# Altium PCB ADC-RDC.PcbDoc (part 1 of 2)
Units mm, origin at the board's own origin, x right, y up, seen from the top; angles counter-clockwise.
Board outline 88 x 48 mm, 4 copper layers (Top Layer, Int1, Int2, Bottom Layer), stack 1.48 mm thick; 188 components, 156 nets, 726 pads, 250 vias.
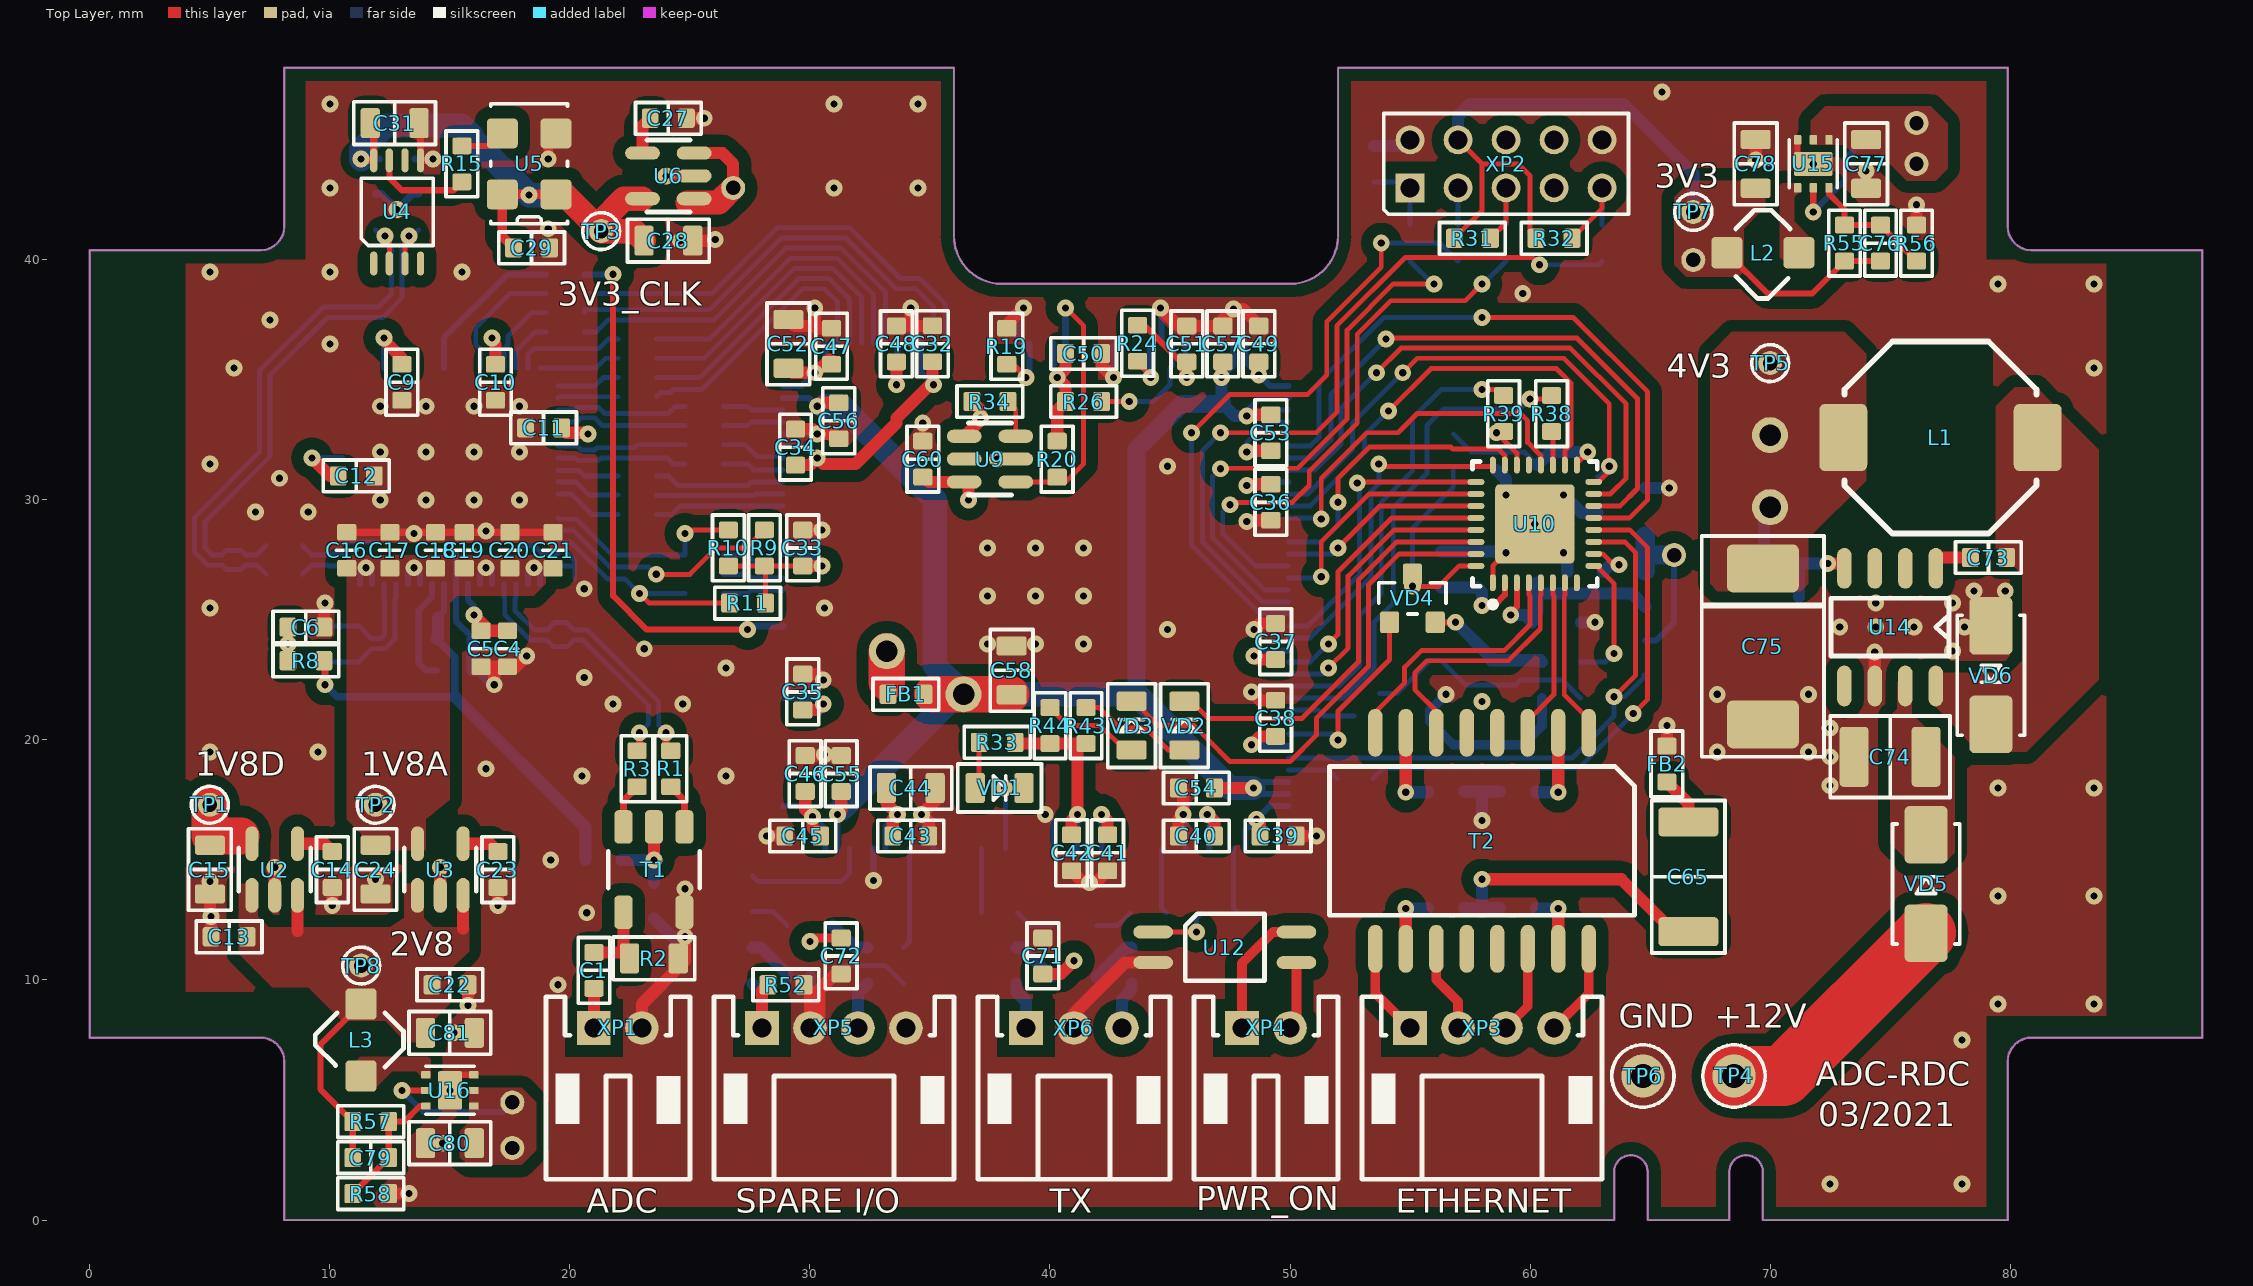
[diagram p0: Top Layer view]
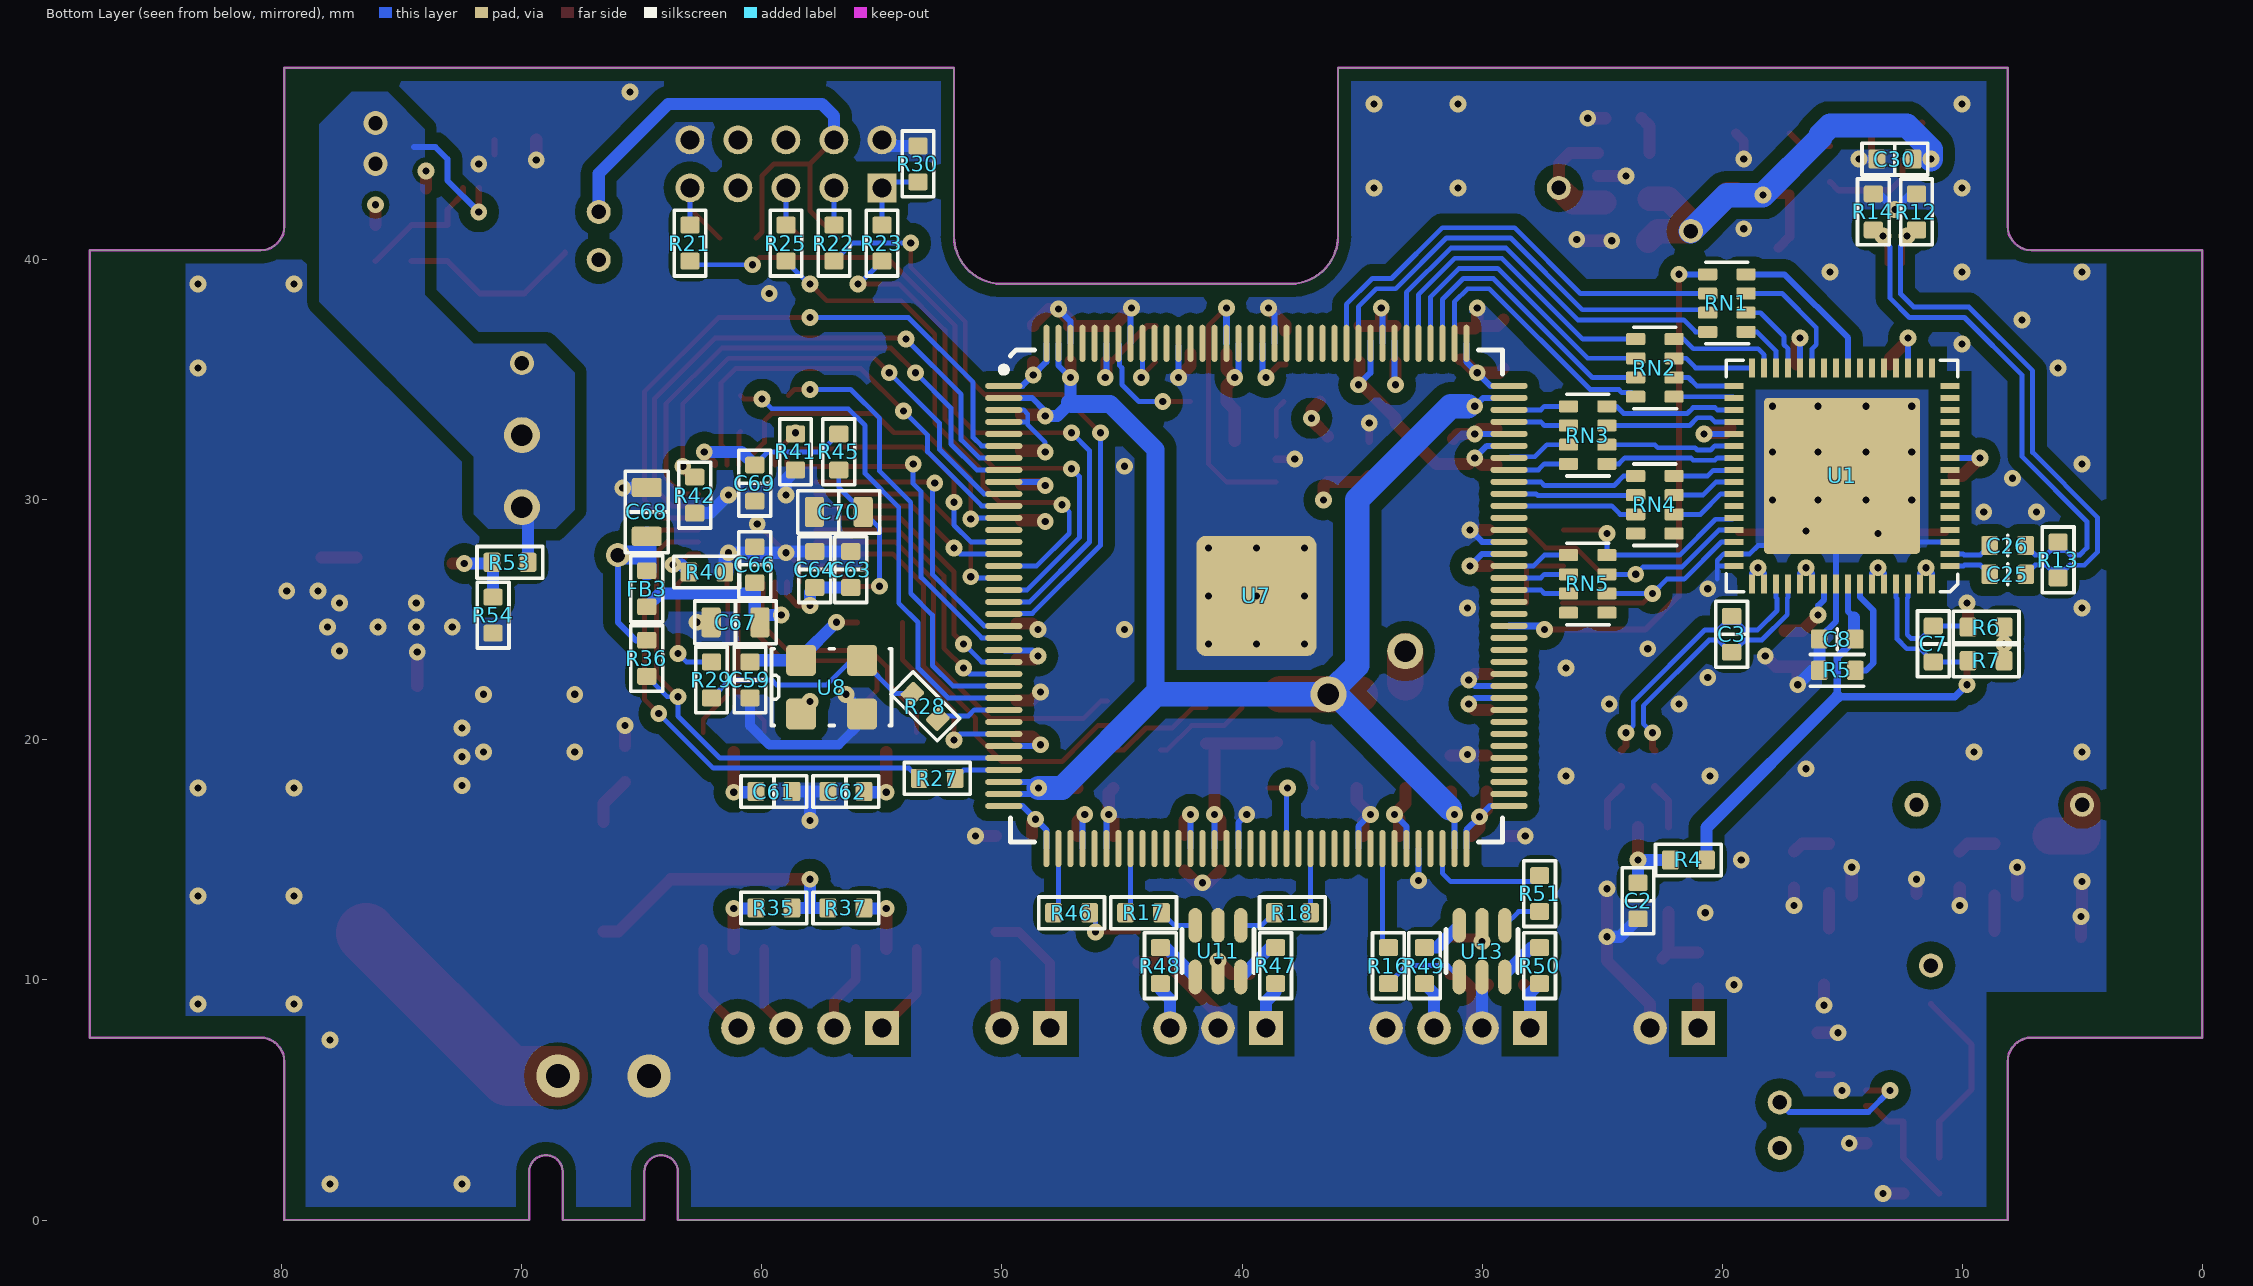
[diagram p1: Bottom Layer view, seen from below]
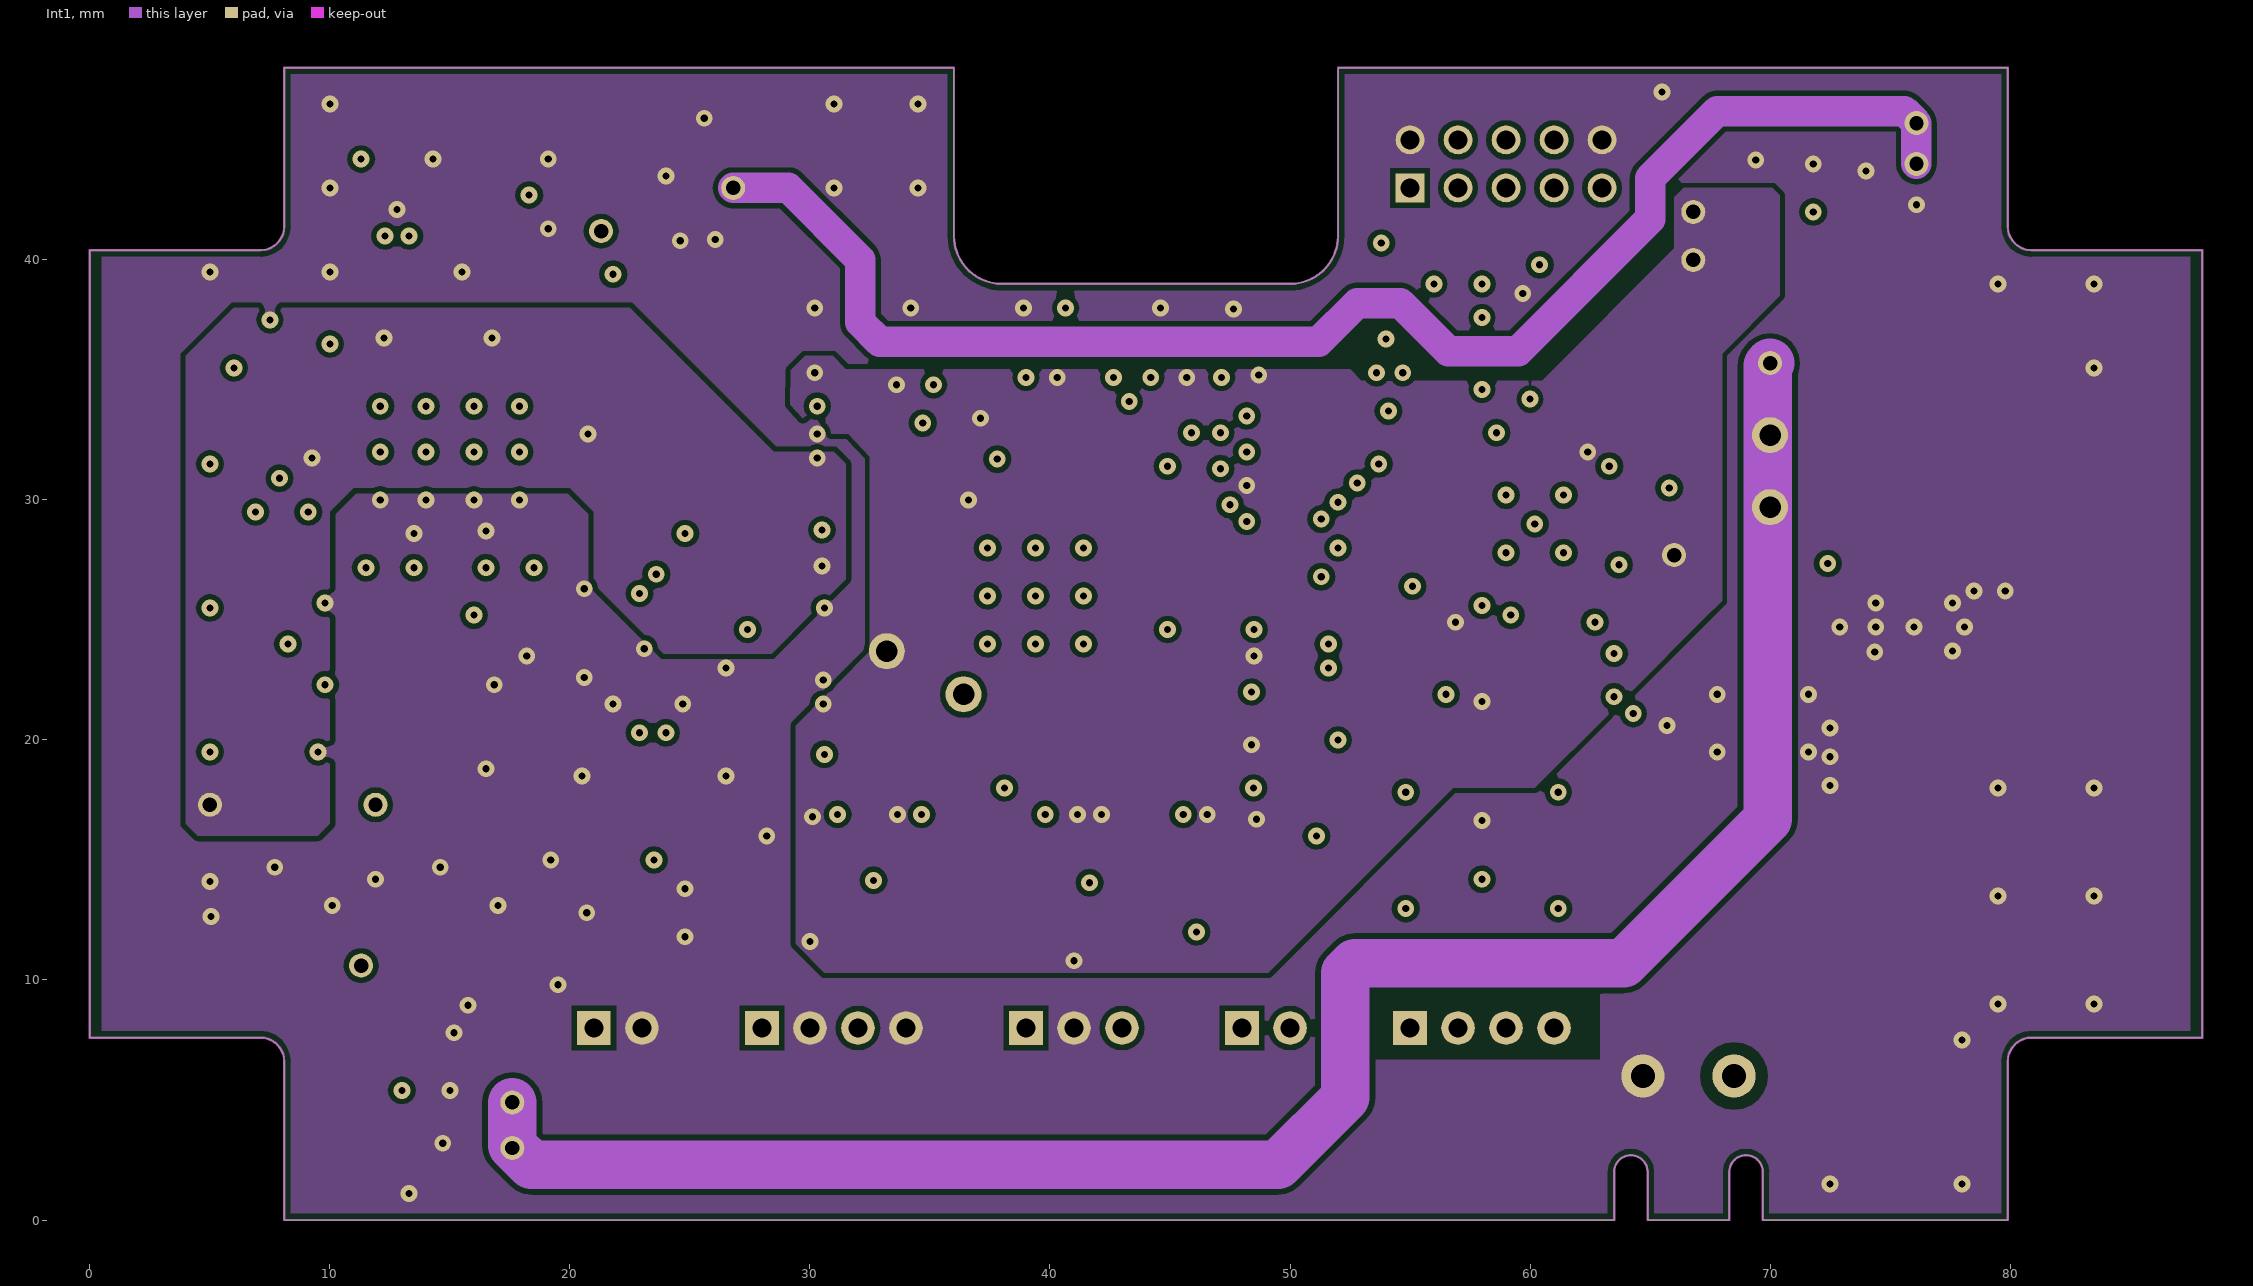
[diagram p2: Int1]
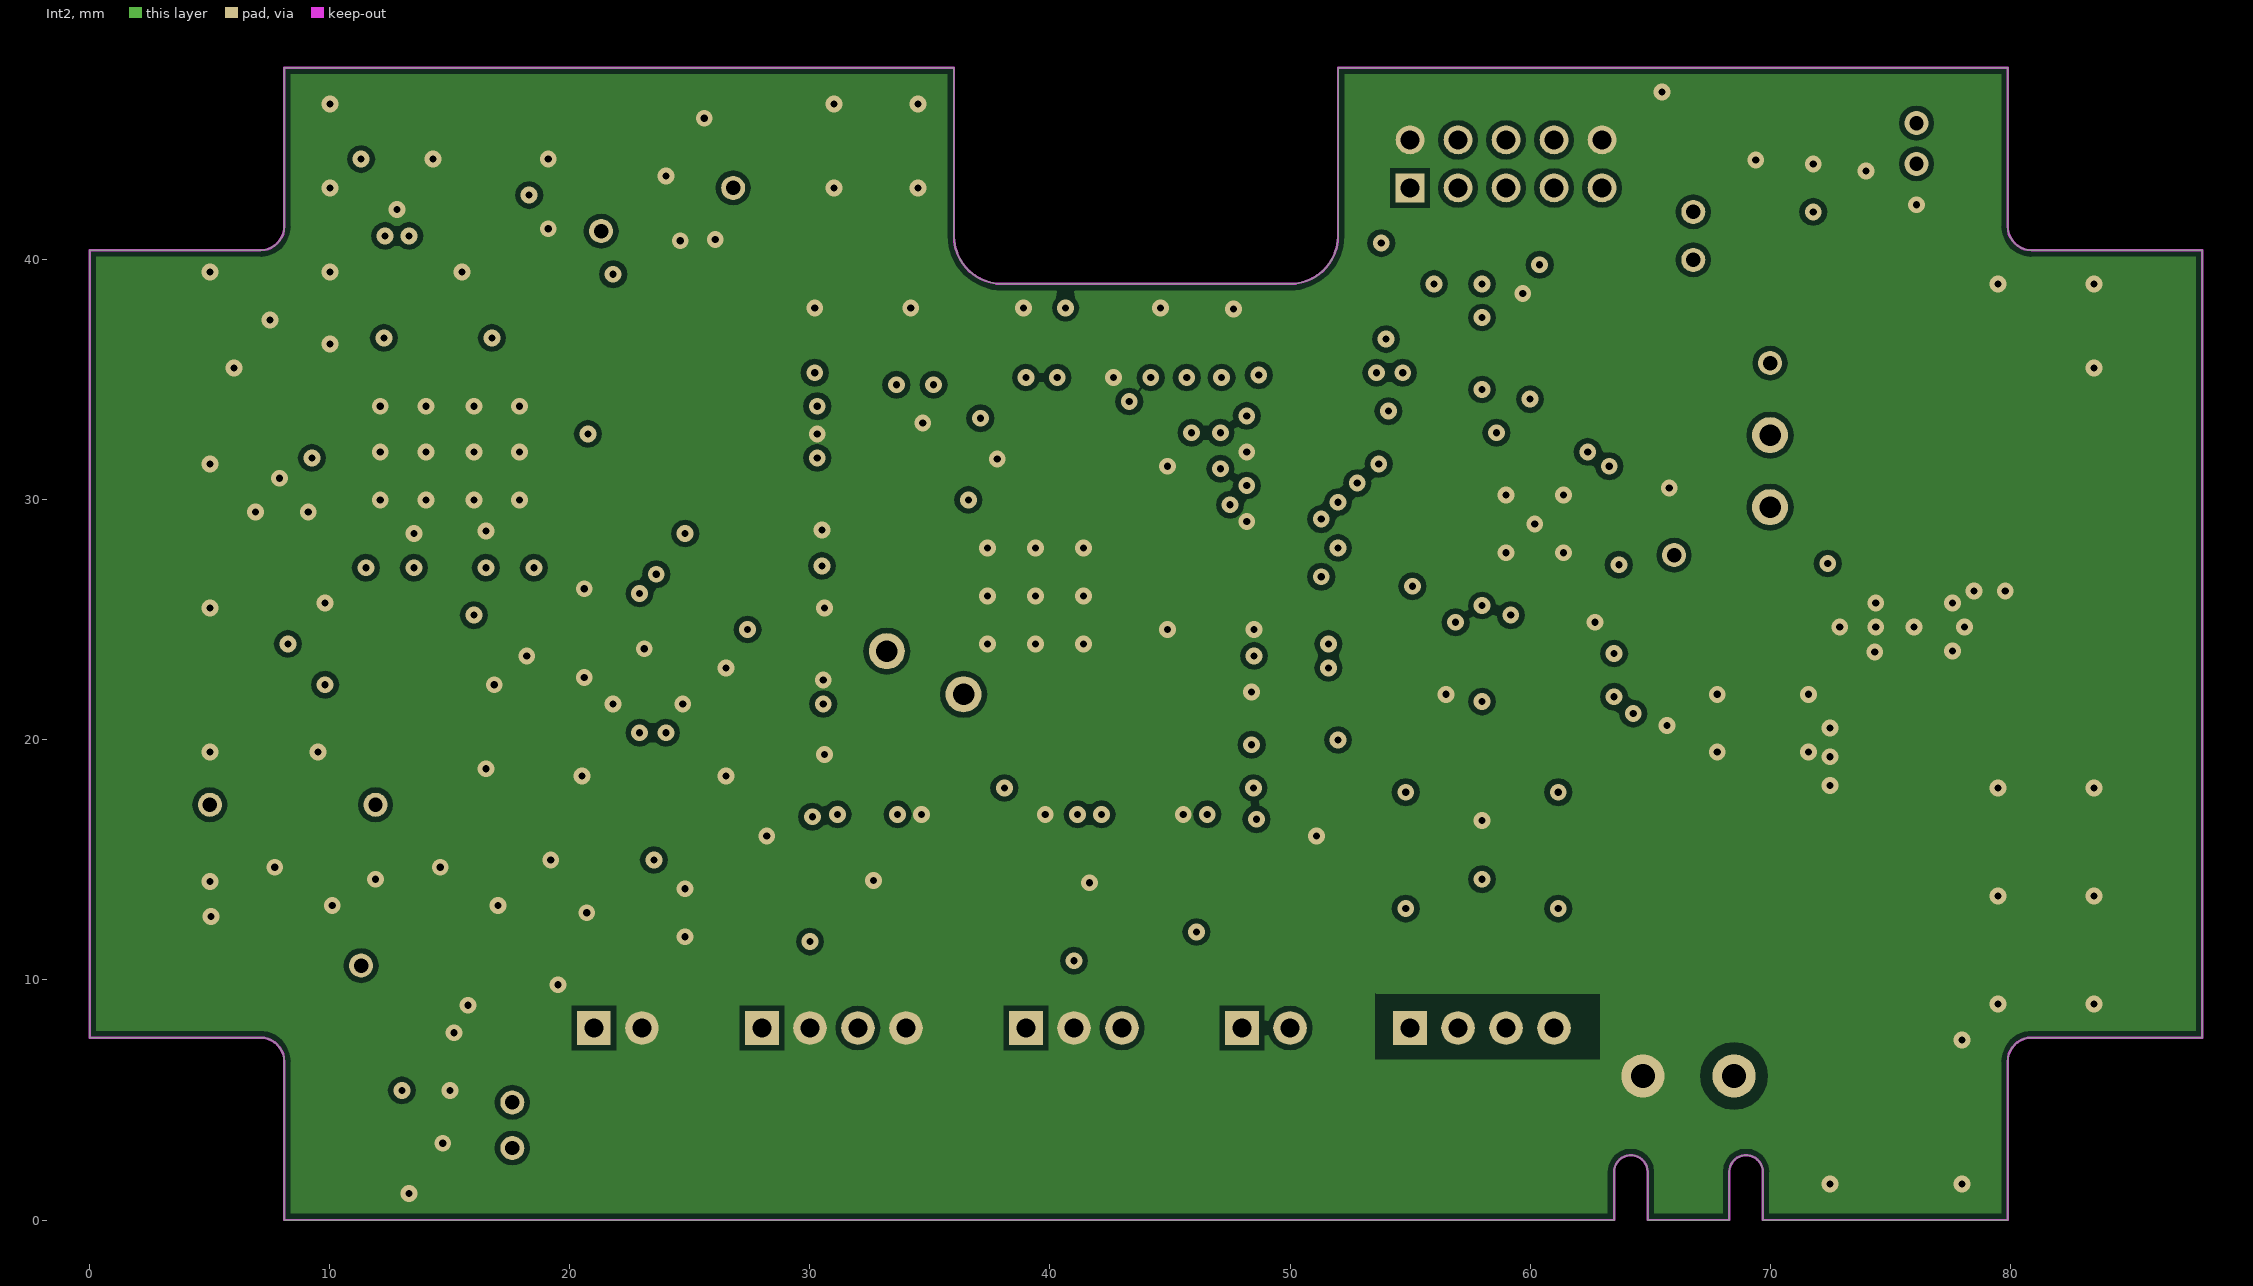
[diagram p3: Int2]

## Layer stack, top to bottom
Top Solder: solder mask 0.0102, Solder Resist, Dk 3.5
Top Layer: signal copper 0.018
Dielectric 1: core 0.254, FR-4, Dk 4.2
Int1: signal copper 0.018
Dielectric 3: prepreg 0.9, Dk 4.2
Int2: signal copper 0.018
Dielectric 2: core 0.254, Dk 4.2
Bottom Layer: signal copper 0.018
Bottom Solder: solder mask 0.0102, Solder Resist, Dk 3.5

## Board outline
0,7.6 7.1,7.6 cw(c7.1,6.6) 8.1,6.6 8.1,0 63.5,0 63.5,2 cw(c64.2,2) 64.9,2 64.9,0 68.3,0 68.3,2 cw(c69,2) 69.7,2 69.7,0 79.9,0 79.9,6.6 cw(c80.9,6.6) 80.9,7.6 88,7.6 88,40.4 80.9,40.4 cw(c80.9,41.4) 79.9,41.4 79.9,48 52,48 52,41 cw(c50,41) 50,39 38,39 cw(c38,41) 36,41 36,48 8.1,48 8.1,41.4 cw(c7.1,41.4) 7.1,40.4 0,40.4

## Design rules (kind name [scope] priority, off if disabled: settings)
Clearance Clearance_Power_pin [IsPad  And (HoleSize  >= 1.0)] p1: gap=0.5 ignorepadtopadclearanceinfootprint=FALSE
Clearance Clearance_out_gnd_poly [(InNet ('GND')  And InPolygon) And (OnLayer('Top Layer') Or OnLayer('Bottom Layer'))] p2: gap=0.5 ignorepadtopadclearanceinfootprint=FALSE
Clearance Clearance_int_poly [InPolygon And (OnLayer('Signal Layer 1') Or OnLayer('Signal Layer 2'))] p3: gap=0.22 ignorepadtopadclearanceinfootprint=FALSE
Clearance [All] p4: gap=0.22 ignorepadtopadclearanceinfootprint=FALSE
ComponentClearance [All] p1: gap=0 collisioncheckmode=3 verticalgap=0.254 showdistances=FALSE
Height [All] p1: minheight=0 maxheight=6 prefheight=6
HoleSize [All] p1: absolutevalues=TRUE maxlimit=5 minlimit=0.3 maxpercent=80.000 minpercent=20.000
MinimumSolderMaskSliver [All] p1: minsoldermaskwidth=0
PolygonConnect PolygonConnect_1 [All] p1: connectstyle=Direct reliefconductorwidth=0.254 reliefentries=4 polygonreliefangle="45 Angle" airgapwidth=0.254
PolygonConnect [InNet('GND')] p2: thpad.connectstyle=Relief thpad.reliefconductorwidth=0.508 thpad.reliefentries=4 thpad.polygonreliefangle="90 Angle" thpad.airgapwidth=0.508 smdpad.connectstyle=Direct smdpad.reliefconductorwidth=0.254 smdpad.reliefentries=4 smdpad.polygonreliefangle="45 Angle" smdpad.airgapwidth=0.254 via.connectstyle=Direct via.reliefconductorwidth=0.254 via.reliefentries=4 via.polygonreliefangle="45 Angle" via.airgapwidth=0.254
RoutingVias [All] p1: holewidth=0.3 width=0.7 viastyle="Through Hole" minholewidth=0.3 minwidth=0.7 maxholewidth=0.3 maxwidth=0.7
SilkToSilkClearance [All] p1: silktosilkclearance=0
SilkToSolderMaskClearance [IsPad] p1: minsilkscreentomaskgap=0 clearancetoexposedcopper=TRUE
SolderMaskExpansion [All] p1: expansion=0.102
Width [All] p1: maxlimit=5 minlimit=0.203 preferedwidth=0.254
24 further rules are at their usual default settings.

## Classes and differential pairs
net class TX_D[3..0]: TX_D0 TX_D1 TX_D2 TX_D3
net class RX_D[3..0]: RX_D0 RX_D1 RX_D2 RX_D3
net class FADCA[13..0]: FADCA0 FADCA1 FADCA2 FADCA3 FADCA4 FADCA5 FADCA6 FADCA7 FADCA8 FADCA9 FADCA10 FADCA11 FADCA12 FADCA13
component class U_ADC-RDC-Power: C73 C74 C75 C76 C77 C78 C79 C80 C81 L1 L2 L3 R53 R54 R55 R56 R57 R58 TP4 TP5 TP6 TP7 TP8 U14 U15 U16 VD5 VD6
component class U_ADC-RDC-PHY: C61 C62 C63 C64 C65 C66 C67 C68 C69 C70 FB2 FB3 R35 R36 R37 R38 R39 R40 R41 R42 R43 R44 R45 T2 U10 VD2 VD3 VD4 XP3
component class U_ADC-RDC-IO: C71 C72 R46 R47 R48 R49 R50 R51 R52 U11 U12 U13 XP4 XP5 XP6
component class U_ADC-RDC-FPGA: C32 C33 C34 C35 C36 C37 C38 C39 C40 C41 C42 C43 C44 C45 C46 C47 C48 C49 C50 C51 C52 C53 C54 C55 C56 C57 C58 C59 C60 FB1 R16 R17 R18 R19 R20 R21 R22 R23 R24 R25 R26 R27 R28 R29 R30 R31 R32 R33 R34 RN5 U7 U8 U9 VD1 XP2
component class U_ADC-RDC-ADC: C1 C2 C3 C4 C5 C6 C7 C8 C9 C10 C11 C12 C13 C14 C15 C16 C17 C18 C19 C20 C21 C22 C23 C24 C25 C26 C27 C28 C29 C30 C31 R1 R2 R3 R4 R5 R6 R7 R8 R9 R10 R11 R12 R13 R14 R15 RN1 RN2 RN3 RN4 T1 TP1 TP2 TP3 U1 U2 U3 U4 U5 U6 XP1

## Components (designator, comment, footprint, x,y, rotation, side; value= is the part's Value field where it differs from the comment)
C1 "0.1uF" C0603 21,10.4 r270 top
C2 "0.1uF" C0603 23.5,13.3 r270 bottom
C3 "10 pF" C0603 19.6,24.4 r270 bottom
C4 "1.0uF" C0603L 17.4,23.8 r90 top
C5 "0.1uF" C0603L 16.3,23.8 r90 top
C6 "0.1uF" C0603 9,24.7 r0 top
C7 "10 pF" C0603 11.2,24 r270 bottom
C8 "0.1uF" C0603L 15.2,24.2 r180 bottom
C9 "0.1uF" C0603 13,34.9 r90 top
C10 "0.1uF" C0603 16.9,34.9 r90 top
C11 "0.1uF" C0603 18.9,33 r0 top
C12 "0.1uF" C0603 11.1,31 r180 top
C13 "0.1uF" C0603 5.8,11.8 r0 top
C14 "0.01uF" C0603 10.1,14.6 r90 top
C15 "22uFx6.3V" C0805 5,14.6 r90 top
C16 "0.1uF" C0603L 10.7,27.9 r270 top
C17 "0.1uF" C0603L 12.5,27.9 r270 top
C18 "0.1uF" C0603L 14.4,27.9 r270 top
C19 "0.1uF" C0603L 15.6,27.9 r270 top
C20 "0.1uF" C0603L 17.5,27.9 r270 top
C21 "0.1uF" C0603L 19.3,27.9 r270 top
C22 "0.1uF" C0603 15,9.8 r180 top
C23 "0.01uF" C0603 17,14.6 r90 top
C24 "22uFx6.3V" C0805 11.9,14.6 r90 top
C25 "0.1uF" C0603L 8.1,26.9 r0 bottom
C26 "0.1uF" C0603L 8.1,28.1 r0 bottom
C27 "0.01uF" C0603 24.1,45.9 r180 top
C28 "22uFx6.3V" C0805 24.1,40.8 r180 top
C29 "0.1uF" C0603 18.4,40.5 r180 top
C30 "0.1uF" C0603 12.8,44.2 r180 bottom
C31 "10uFx10V" C0805 12.7,45.7 r180 top
C32 "0.1uF" C0603 35.1,36.51 r270 top
C33 "0.1uF" C0603 29.7,28 r270 top
C34 "0.1uF" C0603 29.4,32.2 r270 top
C35 "0.1uF" C0603 29.7,22 r270 top
C36 "0.1uF" C0603 49.2,29.9 r90 top
C37 "0.1uF" C0603 49.4,24.1 r270 top
C38 "0.1uF" C0603 49.4,20.9 r270 top
C39 "0.1uF" C0603 49.5,16 r180 top
C40 "0.1uF" C0603 46.1,16 r0 top
C41 "0.1uF" C0603 42.4,15.3 r90 top
C42 "0.1uF" C0603 40.9,15.3 r90 top
C43 "0.1uF" C0603 34.2,16 r180 top
C44 "10uFx10V" C0805 34.2,18 r0 top
C45 "0.1uF" C0603 29.7,16 r0 top
C46 "0.1uF" C0603 29.8,18.6 r270 top
C47 "0.1uF" C0603 30.9,36.4 r270 top
C48 "0.1uF" C0603 33.6,36.5 r270 top
C49 "0.1uF" C0603 48.7,36.5 r270 top
C50 "0.1uF" C0603 41.4,36.1 r180 top
C51 "0.1uF" C0603 45.7,36.5 r270 top
C52 "10uFx10V" C0805 29.1,36.5 r90 top
C53 "0.1uF" C0603 49.2,32.8 r90 top
C54 "0.1uF" C0603 46.1,18 r0 top
C55 "0.1uF" C0603 31.3,18.6 r270 top
C56 "0.1uF" C0603 31.2,33.3 r90 top
C57 "0.1uF" C0603 47.2,36.5 r270 top
C58 "10uFx10V" C0805 38.4,22.9 r90 top
C59 "0.1uF" C0603 60.5,22.5 r90 bottom
C60 "0.1uF" C0603 34.7,31.7 r270 top
C61 "0.1uF" C0603 59.5,17.85 r180 bottom
C62 "0.1uF" C0603 56.5,17.85 r0 bottom
C63 "2.2uFx6.3V" C0603 56.3,27.1 r90 bottom
C64 "0.1uF" C0603 57.8,27.1 r270 bottom
C65 "1nFx3000V" C1808 66.6,14.3 r90 top locked
C66 "0.1uF" C0603 60.3,27.3 r270 bottom
C67 "22uFx6.3V" C0805 61.1,24.9 r180 bottom
C68 "22uFx6.3V" C0805 64.8,29.5 r270 bottom
C69 "0.1uF" C0603 60.3,30.7 r90 bottom
C70 "10uFx10V" C0805 56.8,29.5 r0 bottom
C71 "0.1uF" C0603 39.7,11 r270 top
C72 "0.1uF" C0603 31.3,11 r90 top
C73 "0.01uF" C0603 79.1,27.6 r0 top
C74 "10uFx25V" C1210 75,19.3 r180 top
C75 "100uFx16V" "SIZE E" 69.7,23.9 r270 top
C76 "22pF" C0603 74.6,40.7 r90 top
C77 "10uFx10V" C0805 74,44 r270 top
C78 "10uFx10V" C0805 69.4,44 r90 top
C79 "22pF" C0603 11.7,2.6 r0 top
C80 "10uFx10V" C0805 15,3.2 r180 top
C81 "10uFx10V" C0805 15,7.8 r0 top
FB1 "BLM18AG102SN1" R0603 34,21.9 r180 top
FB2 "BLM18AG121SN1" R0603 65.7,19 r90 top
FB3 "BLM18AG102SN1" R0603 64.8,26.3 r270 bottom
L1 "CDRH8D43NP-330NC" CDRH8D43 77.1,32.6 r180 top
L2 "CDRH2D14NP-2R2N" CDRH2D18 69.7,40.3 r45 top
L3 "CDRH2D14NP-2R2N" CDRH2D18 11.3,7.5 r315 top
R1 "15" R0603 24.2,18.8 r90 top
R2 "51" R0805 23.5,10.9 r0 top
R3 "15" R0603 22.8,18.8 r90 top
R4 "200" R0603 21.4,15 r180 bottom
R5 "10K" R0603L 15.2,22.9 r180 bottom
R6 "15" R0603 9,24.7 r0 bottom
R7 "15" R0603 9,23.3 r0 bottom
R8 "200" R0603 9,23.3 r0 top
R9 "1K" R0603 28.1,28 r90 top
R10 "1K" R0603 26.6,28 r90 top
R11 "1K" R0603 27.4,25.7 r180 top
R12 "240" R0603 11.9,42 r270 bottom
R13 "100" R0603 6,27.5 r90 bottom
R14 "240" R0603 13.7,42 r270 bottom
R15 "10" R0603 15.5,44 r270 top
R16 "33" R0603 33.9,10.6 r90 bottom
R17 "33" R0603 44.1,12.8 r0 bottom
R18 "33" R0603 37.9,12.8 r180 bottom
R19 "10K" R0603 38.2,36.4 r270 top
R20 "10K" R0603 40.3,31.7 r270 top
R21 "33" R0603 63,40.7 r90 bottom
R22 "33" R0603 57,40.7 r90 bottom
R23 "33" R0603 55,40.7 r90 bottom
R24 "10K" R0603 43.65,36.525 r270 top
R25 "33" R0603 59,40.7 r90 bottom
R26 "10K" R0603 41.4,34.1 r0 top
R27 "33" R0603 52.7,18.4 r0 bottom
R28 "33" R0603 53.2,21.4 r225 bottom
R29 "33" R0603 62.1,22.5 r90 bottom
R30 "1K" R0603 53.5,44 r270 bottom
R31 "10K" R0603 57.6,40.9 r0 top
R32 "10K" R0603 61,40.9 r0 top
R33 "1K" R0603 37.8,19.9 r180 top
R34 "3K3" R0603 37.5,34.1 r180 top
R35 "75" R0603 59.5,13 r180 bottom
R36 "3K3" R0603 64.8,23.4 r270 bottom
R37 "75" R0603 56.5,13 r0 bottom
R38 "33" R0603 60.9,33.6 r270 top
R39 "33" R0603 58.9,33.6 r270 top
R40 "6K49" R0603 62.3,27 r180 bottom
R41 "1K" R0603 58.6,32 r270 bottom
R42 "1K" R0603 62.8,30.2 r270 bottom
R43 "330" R0603 41.5,20.6 r270 top
R44 "330" R0603 40,20.6 r270 top
R45 "10K" R0603 56.8,32 r90 bottom
R46 "430" R0603 47.1,12.8 r180 bottom
R47 "33" R0603 38.6,10.6 r270 bottom
R48 "33" R0603 43.4,10.6 r270 bottom
R49 "33" R0603 32.4,10.6 r270 bottom
R50 "33" R0603 27.6,10.6 r270 bottom
R51 "33" R0603 27.6,13.6 r90 bottom
R52 "1K" R0603 29,9.8 r180 top
R53 "10K" R0603 70.5,27.4 r180 bottom
R54 "3K9" R0603 71.2,25.2 r270 bottom
R55 "100K" R0603 73.1,40.7 r270 top
R56 "22K" R0603 76.1,40.7 r90 top
R57 "100K" R0603 11.7,4.1 r180 top
R58 "27K" R0603 11.7,1.1 r0 top
RN1 "33" EXB38V 19.8,38.2 r90 bottom
RN2 "33" EXB38V 22.8,35.5 r90 bottom
RN3 "33" EXB38V 25.6,32.7 r90 bottom
RN4 "33" EXB38V 22.8,29.8 r90 bottom
RN5 "33" EXB38V 25.6,26.5 r90 bottom
T1 "TC1-1T" SM-22 23.5,14.6 r0 top
T2 "S558-5500-25-F" N5 58,15.8 r270 top
TP1 "" TP_1_06 5,17.3 r0 top
TP2 "" TP_1_06 11.9,17.3 r90 top
TP3 "" TP_1_06 21.3,41.2 r90 top
TP4 "" TP_18_10 68.5,6 r90 top
TP5 "" TP_1_06 70,35.7 r90 top
TP6 "" TP_18_10 64.7,6 r90 top
TP7 "" TP_1_06 66.8,42 r180 top
TP8 "" TP_1_06 11.3,10.6 r90 top
U1 "AD9648BCPZ-105" CP-64-4 15,31 r0 bottom
U2 "SPX3819M5-L-1-8" SOT23-5 7.7,14.6 r0 top
U3 "SPX3819M5-L-1-8" SOT23-5 14.6,14.6 r0 top
U4 "MC100EPT20DTG" TSSOP8 12.8,42 r0 top
U5 "FXO-HC536-80.00" HC5 18.3,44 r90 top
U6 "SPX5205M5-3-3" SOT23-5 24.1,43.5 r90 top
U7 "10M08SAE144C8G" EQFP144_L 39.4,26 r180 bottom locked
U8 "FXO-HC536-25.00" HC5 57.1,22.2 r180 bottom
U9 "TPS3106K33DBVT" SOT23-6 37.5,31.7 r90 top
U10 "KSZ8081MNXCA" QFN32_L 60.2,29 r90 top
U11 "SN74LVC2G04DBVR" SOT23-6 41,11.2 r0 bottom
U12 "KPS2805" SOP4 44.3,12 r270 top
U13 "SN74LVC2G04DBVR" SOT23-6 30,11.2 r180 bottom
U14 "TPS5420D" SOIC8 75,24.7 r270 top
U15 "TPS62290DRV" SON6 71.8,44 r0 top
U16 "TPS62290DRV" SON6 15,5.4 r270 top
VD1 "RED" D0805 37.9,18 r0 top
VD2 "RED" D0805 45.6,20.6 r90 top
VD3 "RED" D0805 43.4,20.6 r90 top
VD4 "BAT54A" SOT-23 55.1,25.9 r0 top
VD5 "15MQ040N" SMA 76.5,14 r90 top
VD6 "15MQ040N" SMA 79.2,22.7 r270 top
XP1 "plug_62000211722_WR-WTB_2pin_horiz" conP_WR-WTB_62000211722-2pin_P2000_60x76x48_L 22,8 r90 top
XP2 "PBD2-10" PLD2-10 59,44 r0 top
XP3 "plug_62000411722_WR-WTB_4pin_horiz" conP_WR-WTB_62000411722-4pin_P2000_100x76x48_L 58,8 r90 top
XP4 "plug_62000211722_WR-WTB_2pin_horiz" conP_WR-WTB_62000211722-2pin_P2000_60x76x48_L 49,8 r90 top
XP5 "plug_62000411722_WR-WTB_4pin_horiz" conP_WR-WTB_62000411722-4pin_P2000_100x76x48_L 31,8 r90 top
XP6 "plug_62000311722_WR-WTB_3pin_horiz" conP_WR-WTB_62000311722-3pin_P2000_80x76x48_L 41,8 r90 top

## Footprints (in the part's own frame and the unit in brackets; to place one, negate y for a bottom-side part, rotate by r counter-clockwise, add the part's x,y. Pads: shape width x height; smd on the part's side, far side on the other; paste and mask are expansions set on the pad)
C0603 [mm]
  rrect25% 0.7x0.8 smd: 1(-0.75,0) 2(0.75,0)
  silkscreen extent -1.37,-0.66 1.37,0.66, body extent -0.8,-0.4 0.8,0.4, height 0.8
C0603L [mm]
  rrect25% 0.7x0.8 smd: 1(-0.75,0) 2(0.75,0)
  silkscreen extent 0,-0.43 0,0.43, body extent -0.81,-0.41 0.81,0.41, height 0.8
C0805 [mm]
  rrect25% 0.8x1.25 smd: 1(-1.016,0) 2(1.016,0)
  silkscreen extent -1.7,-0.89 1.7,0.89, body extent -1.05,-0.68 1.05,0.68, height 1.35
C1210 [mm]
  rrect25% 1.2x2.5 smd: 1(-1.5,0) 2(1.5,0)
  silkscreen extent -2.5,-1.7 2.5,1.7, body extent -1.65,-1.25 1.65,1.25, height 2.8
C1808 [mm]
  rrect25% 1.2x2.5 smd: 1(-2.286,0) 2(2.286,0)
  silkscreen extent -3.17,-1.52 3.17,1.52, body extent -2.34,-1.07 2.34,1.07, height 2.2
CDRH2D18 [mm]
  rrect25% 1.3x1.3 smd rot 135: 1(1.061,-1.061) 2(-1.061,1.061)
  silkscreen extent -1.5,-1.5 1.5,1.5, body extent -1.63,-1.63 1.63,1.63, height 2
CDRH8D43 [mm]
  rrect25% 2x2.8 smd: 1(-4.05,0) 2(4.05,0)
  silkscreen extent -4,-4 4,4, body extent -4.1,-4.1 4.1,4.1, height 4.5
conP_WR-WTB_62000211722-2pin_P2000_60x76x48_L [mm] "WR-WTB, 2-Leads, Horizontal THT, Medium Density"
  rect 1.4x1.4 hole 0.8: 1(0,1)
  round 1.4 hole 0.8: 2(0,-1)
  silkscreen extent -6.3,-3 1.3,3, body extent -6.25,-3 1.35,3, height 4.8
conP_WR-WTB_62000311722-3pin_P2000_80x76x48_L [mm] "WR-WTB, 3-Leads, Horizontal THT, High Density"
  rect 1.4x1.4 hole 0.8: 1(0,2)
  round 1.4 hole 0.8: 2(0,0) 3(0,-2)
  silkscreen extent -6.3,-4 1.3,4, body extent -6.25,-4 1.35,4, height 4.8
conP_WR-WTB_62000411722-4pin_P2000_100x76x48_L [mm] "WR-WTB, 4-Leads, Horizontal THT, Medium Density"
  rect 1.4x1.4 hole 0.8: 1(0,3)
  round 1.4 hole 0.8: 2(0,1) 3(0,-1) 4(0,-3)
  silkscreen extent -6.3,-5 1.3,5, body extent -6.25,-5 1.35,5, height 4.8
CP-64-4 [mm]
  rrect5% 6.5x6.5 smd: 0(0,0)
  rect 0.8x0.25 smd: 1(-4.5,3.75) 2(-4.5,3.25) 3(-4.5,2.75) 4(-4.5,2.25) 5(-4.5,1.75) 6(-4.5,1.25) 7(-4.5,0.75) 8(-4.5,0.25) 9(-4.5,-0.25) 10(-4.5,-0.75) 11(-4.5,-1.25) 12(-4.5,-1.75) 13(-4.5,-2.25) 14(-4.5,-2.75) 15(-4.5,-3.25) 16(-4.5,-3.75) 33(4.5,-3.75) 34(4.5,-3.25) 35(4.5,-2.75) 36(4.5,-2.25) 37(4.5,-1.75) 38(4.5,-1.25) 39(4.5,-0.75) 40(4.5,-0.25) 41(4.5,0.25) 42(4.5,0.75) 43(4.5,1.25) 44(4.5,1.75) 45(4.5,2.25) 46(4.5,2.75) 47(4.5,3.25) 48(4.5,3.75)
  rect 0.25x0.8 smd: 17(-3.75,-4.5) 18(-3.25,-4.5) 19(-2.75,-4.5) 20(-2.25,-4.5) 21(-1.75,-4.5) 22(-1.25,-4.5) 23(-0.75,-4.5) 24(-0.25,-4.5) 25(0.25,-4.5) 26(0.75,-4.5) 27(1.25,-4.5) 28(1.75,-4.5) 29(2.25,-4.5) 30(2.75,-4.5) 31(3.25,-4.5) 32(3.75,-4.5) 49(3.75,4.5) 50(3.25,4.5) 51(2.75,4.5) 52(2.25,4.5) 53(1.75,4.5) 54(1.25,4.5) 55(0.75,4.5) 56(0.25,4.5) 57(-0.25,4.5) 58(-0.75,4.5) 59(-1.25,4.5) 60(-1.75,4.5) 61(-2.25,4.5) 62(-2.75,4.5) 63(-3.25,4.5) 64(-3.75,4.5)
  silkscreen extent -4.82,-4.82 4.82,4.82, body extent -4.58,-4.58 4.58,4.58, height 1
D0805 [mm]
  rrect25% 0.8x1.25 smd: 1(-1.016,0) 2(1.016,0)
  silkscreen extent -1.75,-1 1.75,1, body extent -1.05,-0.68 1.05,0.68, height 1.35
EQFP144_L [mm] "144-Pin Plastic Enhanced Quad Flat Pack, Body 20x20mm, Pitch 0.5mm, IPC High Density"
  rrect15% 5x5 smd: 0(0,0)
  oval 1.55x0.25 smd: 1(-10.525,8.75) 2(-10.525,8.25) 3(-10.525,7.75) 4(-10.525,7.25) 5(-10.525,6.75) 6(-10.525,6.25) 7(-10.525,5.75) 8(-10.525,5.25) 9(-10.525,4.75) 10(-10.525,4.25) 11(-10.525,3.75) 12(-10.525,3.25) 13(-10.525,2.75) 14(-10.525,2.25) 15(-10.525,1.75) 16(-10.525,1.25) 17(-10.525,0.75) 18(-10.525,0.25) 19(-10.525,-0.25) 20(-10.525,-0.75) 21(-10.525,-1.25) 22(-10.525,-1.75) 23(-10.525,-2.25) 24(-10.525,-2.75) 25(-10.525,-3.25) 26(-10.525,-3.75) 27(-10.525,-4.25) 28(-10.525,-4.75) 29(-10.525,-5.25) 30(-10.525,-5.75) 31(-10.525,-6.25) 32(-10.525,-6.75) 33(-10.525,-7.25) 34(-10.525,-7.75) 35(-10.525,-8.25) 36(-10.525,-8.75) 73(10.525,-8.75) 74(10.525,-8.25) 75(10.525,-7.75) 76(10.525,-7.25) 77(10.525,-6.75) 78(10.525,-6.25) 79(10.525,-5.75) 80(10.525,-5.25) 81(10.525,-4.75) 82(10.525,-4.25) 83(10.525,-3.75) 84(10.525,-3.25) 85(10.525,-2.75) 86(10.525,-2.25) 87(10.525,-1.75) 88(10.525,-1.25) 89(10.525,-0.75) 90(10.525,-0.25) 91(10.525,0.25) 92(10.525,0.75) 93(10.525,1.25) 94(10.525,1.75) 95(10.525,2.25) 96(10.525,2.75) 97(10.525,3.25) 98(10.525,3.75) 99(10.525,4.25) 100(10.525,4.75) 101(10.525,5.25) 102(10.525,5.75) 103(10.525,6.25) 104(10.525,6.75) 105(10.525,7.25) 106(10.525,7.75) 107(10.525,8.25) 108(10.525,8.75)
  oval 0.25x1.55 smd: 37(-8.75,-10.525) 38(-8.25,-10.525) 39(-7.75,-10.525) 40(-7.25,-10.525) 41(-6.75,-10.525) 42(-6.25,-10.525) 43(-5.75,-10.525) 44(-5.25,-10.525) 45(-4.75,-10.525) 46(-4.25,-10.525) 47(-3.75,-10.525) 48(-3.25,-10.525) 49(-2.75,-10.525) 50(-2.25,-10.525) 51(-1.75,-10.525) 52(-1.25,-10.525) 53(-0.75,-10.525) 54(-0.25,-10.525) 55(0.25,-10.525) 56(0.75,-10.525) 57(1.25,-10.525) 58(1.75,-10.525) 59(2.25,-10.525) 60(2.75,-10.525) 61(3.25,-10.525) 62(3.75,-10.525) 63(4.25,-10.525) 64(4.75,-10.525) 65(5.25,-10.525) 66(5.75,-10.525) 67(6.25,-10.525) 68(6.75,-10.525) 69(7.25,-10.525) 70(7.75,-10.525) 71(8.25,-10.525) 72(8.75,-10.525) 109(8.75,10.525) 110(8.25,10.525) 111(7.75,10.525) 112(7.25,10.525) 113(6.75,10.525) 114(6.25,10.525) 115(5.75,10.525) 116(5.25,10.525) 117(4.75,10.525) 118(4.25,10.525) 119(3.75,10.525) 120(3.25,10.525) 121(2.75,10.525) 122(2.25,10.525) 123(1.75,10.525) 124(1.25,10.525) 125(0.75,10.525) 126(0.25,10.525) 127(-0.25,10.525) 128(-0.75,10.525) 129(-1.25,10.525) 130(-1.75,10.525) 131(-2.25,10.525) 132(-2.75,10.525) 133(-3.25,10.525) 134(-3.75,10.525) 135(-4.25,10.525) 136(-4.75,10.525) 137(-5.25,10.525) 138(-5.75,10.525) 139(-6.25,10.525) 140(-6.75,10.525) 141(-7.25,10.525) 142(-7.75,10.525) 143(-8.25,10.525) 144(-8.75,10.525)
  silkscreen extent -10.65,-10.25 10.25,10.25, body extent -10.05,-10.05 10.05,10.05, height 1.6
EXB38V [mm] "Chip Resistor Array, (0603x4); SM; 8 Leads; Body 3.40 x 1.75 mm (LxW max)"
  rrect25% 0.5x0.8 smd: 1(-1.2,-0.8) 2(-0.4,-0.8) 3(0.4,-0.8) 4(1.2,-0.8) 5(1.2,0.8) 6(0.4,0.8) 7(-0.4,0.8) 8(-1.2,0.8)
  silkscreen extent -1.7,-0.9 1.7,0.87, body extent -1.68,-1.08 1.68,1.08, height 0.6
HC5 [mm] "HCMOS 5 x 3.2mm 3.3V Oscillator"
  rrect25% 1.24x1.29 smd: 1(-1.27,-1.118) 2(1.27,-1.118) 3(1.27,1.118) 4(-1.27,1.118)
  silkscreen extent -2.5,-1.6 2.5,1.6, body extent -2.6,-1.7 2.6,1.7, height 1.4
N5 [mm] "N5 Package"
  oval 2x0.6 smd: 1(-4.5,4.445) 2(-4.5,3.175) 3(-4.5,1.905) 4(-4.5,0.635) 5(-4.5,-0.635) 6(-4.5,-1.905) 7(-4.5,-3.175) 8(-4.5,-4.445) 9(4.5,-4.445) 10(4.5,-3.175) 11(4.5,-1.905) 12(4.5,-0.635) 13(4.5,0.635) 14(4.5,1.905) 15(4.5,3.175) 16(4.5,4.445)
  silkscreen extent -3.1,-6.35 3.1,6.35, body extent -3.61,-6.4 3.61,6.4, height 5.71
PLD2-10 [mm]
  rect 1.2x1.2 hole 0.8: 1(-4,-1)
  round 1.2 hole 0.8: 2(-4,1) 3(-2,-1) 4(-2,1) 5(0,-1) 6(0,1) 7(2,-1) 8(2,1) 9(4,-1) 10(4,1)
  silkscreen extent -5.1,-2.1 5.1,2.1, body extent -5,-2 5,2, height 6
QFN32_L [mm] "QFN, 32-Leads, Body 5x5mm, Pitch 0.5mm, IPC High Density"
  oval 0.7x0.25 smd: 1(-2.45,1.75) 2(-2.45,1.25) 3(-2.45,0.75) 4(-2.45,0.25) 5(-2.45,-0.25) 6(-2.45,-0.75) 7(-2.45,-1.25) 8(-2.45,-1.75) 17(2.45,-1.75) 18(2.45,-1.25) 19(2.45,-0.75) 20(2.45,-0.25) 21(2.45,0.25) 22(2.45,0.75) 23(2.45,1.25) 24(2.45,1.75)
  oval 0.25x0.7 smd: 9(-1.75,-2.45) 10(-1.25,-2.45) 11(-0.75,-2.45) 12(-0.25,-2.45) 13(0.25,-2.45) 14(0.75,-2.45) 15(1.25,-2.45) 16(1.75,-2.45) 25(1.75,2.45) 26(1.25,2.45) 27(0.75,2.45) 28(0.25,2.45) 29(-0.25,2.45) 30(-0.75,2.45) 31(-1.25,2.45) 32(-1.75,2.45)
  rrect10% 3.3x3.3 smd: 33(0,0)
  silkscreen extent -3.47,-2.6 2.6,2.6, body extent -2.63,-2.62 2.62,2.63, height 1
R0603 [mm]
  rrect25% 0.7x0.8 smd: 1(-0.75,0) 2(0.75,0)
  silkscreen extent -1.37,-0.66 1.37,0.66, body extent -0.81,-0.41 0.81,0.41, height 0.8
R0603L [mm]
  rrect25% 0.7x0.8 smd: 1(-0.75,0) 2(0.75,0)
  silkscreen extent -1.12,-0.66 1.12,0.66, body extent -0.81,-0.41 0.81,0.41, height 0.8
R0805 [mm]
  rrect25% 0.8x1.25 smd: 1(-1.016,0) 2(1.016,0)
  silkscreen extent -1.7,-0.89 1.7,0.89, body extent -1.05,-0.68 1.05,0.68, height 1.35
"SIZE E" [mm]
  rrect25% 2x3 smd: 1(-3.25,0) 2(3.25,0)
  silkscreen extent -4.6,-2.55 4.6,2.55, body extent -3.7,-2.23 3.7,2.23, height 4.1
SM-22 [mil] "5 Leads; Body 3.8 x 3.8 mm, inc. leads (LxW max)"
  rrect50% 30x55 smd: 1(-50,70) 2(0,70) 3(50,70) 4(50,-70) 6(-50,-70)
  silkscreen extent -75,-30 75,30, body extent -79,-79 79,79, height 150
SMA [mm] "DO-214-AC/SMA; 2 C-Bend Leads; Body 5 x 2.7 mm, inc. leads (LxW)"
  rrect25% 2.4x1.8 smd: 1(-2.05,0) 2(2.05,0)
  silkscreen extent -2.5,-1.4 2.5,1.4, body extent -2.58,-1.48 2.58,1.48, height 2.44
SOIC8 [mm] "8-Pin Small Outline Integrated Circuit 1.27 mm Pitch, IPC High Density"
  oval 1.7x0.6 smd: 1(-2.45,1.905) 2(-2.45,0.635) 3(-2.45,-0.635) 4(-2.45,-1.905) 5(2.45,-1.905) 6(2.45,-0.635) 7(2.45,0.635) 8(2.45,1.905)
  silkscreen extent -1.2,-2.47 1.2,2.46, body extent -2.05,-2.52 2.05,2.51, height 1.73
SON6 [mm]
  rrect25% 0.3x0.4 smd paste+0: 1(-0.65,-1) 2(0,-1) 3(0.65,-1) 4(0.65,1) 5(0,1) 6(-0.65,1)
  rrect15% 1.6x1 smd paste+0: 7(0,0)
  silkscreen extent -1,-1 1,1, body extent -1.08,-1.08 1.08,1.08, height 0.8
SOP4 [mil]
  oval 21x65 smd: 1(0,0) 2(50,0) 3(50,235) 4(0,235)
  silkscreen extent -30,52 80,183, body extent -34,26 84,209, height 79
SOT23-5 [mm] "SOT-23/SC-74A; 5 Leads; Body 3.1 x 3 mm, inc. leads (LxW max)"
  oval 0.55x1.45 smd: 1(-0.95,-1.075) 2(0,-1.075) 3(0.95,-1.075) 4(0.95,1.075) 5(-0.95,1.075)
  silkscreen extent -1.5,-0.9 1.5,0.9, body extent -1.6,-0.97 1.6,0.98, height 1.45
SOT23-6 [mm] "SOT-23/SC-74A;6 Leads; Body 3.1 x 3 mm, inc. leads (LxW max)"
  oval 0.55x1.45 smd: 1(-0.95,-1.075) 2(0,-1.075) 3(0.95,-1.075) 4(0.95,1.075) 5(0,1.075) 6(-0.95,1.075)
  silkscreen extent -1.5,-0.9 1.5,0.9, body extent -1.6,-0.97 1.6,0.98, height 1.45
SOT-23 [mm] "SOT-23; 3 Leads; Body 2.8 x 1.3 mm, inc. leads (LxW max)"
  rrect25% 0.8x0.9 smd: 1(-0.95,-1) 2(0.95,-1) 3(0,1)
  silkscreen extent -1.4,-0.65 1.4,0.65, body extent -1.48,-0.73 1.48,0.73, height 1.1
TP_1_06 [mm]
  round 1 hole 0.6: 1(0,0)
  silkscreen extent -0.77,-0.77 0.77,0.77
TP_18_10 [mm]
  round 1.8 hole 1: 1(0,0)
  silkscreen extent -1.3,-1.3 1.3,1.3
TSSOP8 [mm]
  oval 0.3x1 smd: 1(-0.975,-2.15) 2(-0.325,-2.15) 3(0.325,-2.15) 4(0.975,-2.15) 5(0.975,2.15) 6(0.325,2.15) 7(-0.325,2.15) 8(-0.975,2.15)
  silkscreen extent -1.5,-1.4 1.5,1.4, body extent -1.58,-1.58 1.58,1.58, height 1.1

## Part data
C1 C2 C3 C4 C5 C6 C7 C8 C9 C10 C11 C12 C13 C14 C15 C16 C17 C18 C19 C20 C21 C22 C23 C24 C25 C26 C27 C28 C29 C30 C31 C32 C33 C34 C35 C36 C37 C38 C39 C40 C41 C42 C43 C44 C45 C46 C47 C48 C49 C50 C51 C52 C53 C54 C55 C56 C57 C58 C59 C60 C61 C62 C63 C64 C65 C66 C67 C68 C69 C70 C71 C72 C73 C74 C76 C77 C78 C79 C80 C81: library part Cap, "Capacitor, 2pin"
C75: library part "Cap Pol", "Polarized Capacitor, 2pin"
FB1 FB2 FB3 L1 L2 L3: library part Inductor, "Inductor, 2pin"
R1 R2 R3 R4 R5 R6 R7 R8 R9 R10 R11 R12 R13 R14 R15 R16 R17 R18 R19 R20 R21 R22 R23 R24 R25 R26 R27 R28 R29 R30 R31 R32 R33 R34 R35 R36 R37 R38 R39 R40 R41 R42 R43 R44 R45 R46 R47 R48 R49 R50 R51 R52 R53 R54 R55 R56 R57 R58: library part RES, "Resistor, 2pin"
RN1 RN2 RN3 RN4 RN5: library part "x4 Resistor Array", "x4 Resistor Array"
T1: "Center-Tapped Transformer (Ideal)"
T2: library part TG110-E050N5, "Center-Tapped Transformer (Ideal)"
TP1 TP2 TP3 TP4 TP5 TP6 TP7 TP8: library part Test_point, "Test point"
U1: "14-Bit, 125 MSPS/105 MSPS, 1.8 V Dual  Analog-to-Digital Converter"
U2 U3 U6: "LDO Voltage Regulator"
U4: library part MC100EPT20DT, "3.3 V TTL/CMOS to differential PECL translator"
U5 U8: library part SG-636PTF-40.0000, "Surface Mount Crystal Oscillator"
U7: library part 10M04SAE144C8G, "Cyclone III Family FPGA, 94 I/O Pins, 4 PLLs, 144-Pin EQFP, Speed Grade 8, Commercial Grade, Pb-Free"
U9: library part TPS3106
U10: "10BASE-T/100BASE-TX Physical Layer Transceiver"
U11 U13: "DUAL INVERTER GATE"
U12: library part Optoisolator, "Phototransistor Optocoupler, 4-Pin"
U14: library part TPS5420, "2-A, WIDE INPUT RANGE, STEP-DOWN SWIFT™ CONVERTER"
U15 U16: library part TPS62290, "1-A Step Down Converter in 2 x 2 SON Package"
VD1 VD2 VD3: library part LED, "Typical GaAs LED"
VD4: "Schottky Barrier Double Diode"
VD5 VD6: library part "D Schottky", "Schottky Diode, 2pin"
XP1 XP4: "2.00mm Male Horizontal Shrouded Header WR-WTB", Case_code=WR-WTB_2pin_horiz, Manufacturer="\"Wurth Elektronik\"", Package=conP_WR-WTB_62000211722-2pin_P2000_60x76x48, Area(mm2)=45,6, Component_ID=plug_62000211722_WR-WTB_2pin_horiz, Component_name=62000211722, Component Class=Plug_PCB_mounting, ComponentLink1Description=plug_62000211722.pdf, ComponentLink1URL=C:\chkout_AltiumLib\Datasheets\Electromechanics_datasheet\Connectors\plug_62000211722.pdf, ComponentLink2Description=plug_62000211722_URL_Link, ComponentLink2URL=http://katalog.we-online.com/en/em/WTB_2_00_MALE_HORIZONTAL_SHROUDED_HEADER_6200XX11722/62000211722?sid=a40b27176d, Height(mm)=4,8, HelpURL=C:\chkout_AltiumLib\Datasheets\Electromechanics_datasheet\Connectors\plug_62000211722.pdf, LxWxH(mm)=6,0x7,6x4,8, Mounting_type=Standard, Number_of_pads=2, Part_number_PROSA=D-VI-6267, PROSA_name (Old name)=62000211722, Type=Вилки
XP2: library part "Header 5X2", "Header, 5-Pin, Dual row"
XP3 XP5: "2.00mm Male Vertical Shrouded Header WR-WTB", Case_code=WR-WTB_4pin_horiz, Manufacturer="\"Wurth Elektronik\"", Package=conP_WR-WTB_62000411722-4pin_P2000_100x76x48, Area(mm2)=76, Component_ID=plug_62000411722_WR-WTB_4pin_horiz, Component_name=62000411722, Component Class=Plug_PCB_mounting, ComponentLink1Description=plug_62000411722.pdf, ComponentLink1URL=C:\chkout_AltiumLib\Datasheets\Electromechanics_datasheet\Connectors\plug_62000411722.pdf, ComponentLink2Description=plug_62000411722_URL_Link, ComponentLink2URL=http://katalog.we-online.de/en/em/WTB_2_00_MALE_VERTICAL_SHROUDED_HEADER_6200XX11622, Height(mm)=4,8, HelpURL=C:\chkout_AltiumLib\Datasheets\Electromechanics_datasheet\Connectors\plug_62000411722.pdf, LxWxH(mm)=10,0x7,6x4,8, Mounting_type=Standard, Number_of_pads=4, Part_number_PROSA=D-VI-6034, PROSA_name (Old name)=62000411722, Type=Вилки
XP6: "2.00mm Male Vertical Shrouded Header WR-WTB", Case_code=WR-WTB_3pin_horiz, Manufacturer="\"Wurth Elektronik\"", Package=conP_WR-WTB_62000311722-3pin_P2000_80x76x48, Area(mm2)=60,8, Component_ID=plug_62000311722_WR-WTB_3pin_horiz, Component_name=62000311722, Component Class=Plug_PCB_mounting, ComponentLink1Description=plug_62000311722.pdf, ComponentLink1URL=C:\chkout_AltiumLib\Datasheets\Electromechanics_datasheet\Connectors\plug_62000311722.pdf, ComponentLink2Description=plug_62000311722_URL_Link, ComponentLink2URL=http://katalog.we-online.de/en/em/WTB_2_00_MALE_VERTICAL_SHROUDED_HEADER_6200XX11622, Height(mm)=4,8, HelpURL=C:\chkout_AltiumLib\Datasheets\Electromechanics_datasheet\Connectors\plug_62000311722.pdf, LxWxH(mm)=8,0x7,6x4,8, Mounting_type=Standard, Number_of_pads=3, Part_number_PROSA=D-VI-6523, PROSA_name (Old name)=62000311722, Type=Вилки

## Free pads (board coordinates)
  round 1 hole 0.6: 0(17.6,3) 0(17.6,4.9) 0(26.8,43) 0(66,27.7) 0(66.8,40) 0(76.1,44) 0(76.1,45.7)
  round 1.5 hole 0.9: 0(70,29.7) 1(33.2,23.7) 1(36.4,21.9) 1(70,32.7)

## Via types
v1: diameter 0.7, hole 0.3, Top Layer to Bottom Layer, tented both sides, 250 vias

## Nets (pads, with @x,y where several pads share a name; then routed paths per layer and width w, separated by ;. In a path a pad name is that pad's centre, name@x,y a point inside that pad or via, vN(x,y) a via of type N, cw(c..) or ccw(c..) an arc to the next point about the centre after c; other vN are vias at no path point)
ADCA0: RN1.3 U1.27 | length 5.3
  Bottom Layer w0.203: U1.27@16.25,35.5 16.25,36.3 16.078,36.472 16.078,37.178 17.5,38.6 RN1.3@19,38.6
ADCA1: RN1.2 U1.29 | length 3.4
  Bottom Layer w0.203: U1.29@17.25,35.5 17.25,36.3 17.422,36.472 17.422,36.822 18.4,37.8 RN1.2@19,37.8
ADCA2: RN1.1 U1.30 | length 2.3
  Bottom Layer w0.203: U1.30@17.75,35.5 17.75,36.202 18.548,37 RN1.1@19,37
ADCA3: RN2.4 U1.31 | length 4.6
  Bottom Layer w0.203: U1.31@18.25,35.5 18.25,36.05 18.5,36.3 21.2,36.3 21.6,36.7 RN2.4@22,36.7
ADCA4: RN2.3 U1.32 | length 3.4
  Bottom Layer w0.203: U1.32@18.75,35.5 21.1,35.5 21.5,35.9 RN2.3@22,35.9
ADCA5: RN2.2 U1.33 | length 2.6
  Bottom Layer w0.203: U1.33@19.5,34.75 21.05,34.75 21.4,35.1 RN2.2@22,35.1
ADCA6: RN2.1 U1.34 | length 2.5
  Bottom Layer w0.203: U1.34@19.5,34.25 19.55,34.3 RN2.1@22,34.3
ADCA7: RN3.4 U1.35 | length 5.6
  Bottom Layer w0.203: U1.35@19.5,33.75 20.202,33.75 20.297,33.845 21.203,33.845 21.448,33.6 24.1,33.6 24.4,33.9 RN3.4@24.8,33.9
ADCA8: RN3.3 U1.36 | length 5.5
  Bottom Layer w0.203: U1.36@19.5,33.25 20.3,33.25 20.472,33.422 21.028,33.422 21.35,33.1 RN3.3@24.8,33.1
ADCA9: RN3.2 U1.38 | length 5.5
  Bottom Layer w0.203: U1.38@19.5,32.25 20.3,32.25 20.472,32.078 21.028,32.078 21.123,32.173 22.673,32.173 22.8,32.3 RN3.2@24.8,32.3
ADCA10: RN3.1 U1.39 | length 5.5
  Bottom Layer w0.203: U1.39@19.5,31.75 20.202,31.75 20.297,31.655 21.203,31.655 21.298,31.75 24.05,31.75 24.3,31.5 RN3.1@24.8,31.5
ADCA11: RN4.4 U1.40 | length 2.6
  Bottom Layer w0.203: U1.40@19.5,31.25 19.5,31.232 20.368,31.232 20.6,31 RN4.4@22,31
ADCA12: RN4.3 U1.41 | length 2.7
  Bottom Layer w0.203: U1.41@19.5,30.75 20.25,30.75 20.8,30.2 RN4.3@22,30.2
ADCA13: RN4.2 U1.42 | length 2.9
  Bottom Layer w0.203: U1.42@19.5,30.25 20.05,30.25 20.9,29.4 RN4.2@22,29.4
ATCK: R23.2 R30.2 XP2.1 | length 3.2
  Bottom Layer w0.203: R30.2@53.5,43.25 54.75,43.25 XP2.1@55,43 R23.2@55,41.45
ATDI: R21.2 R32.2 XP2.9 | length 4.2
  Top Layer w0.203: R32.2@61.75,40.9 63,42.15 XP2.9@63,43
  Bottom Layer w0.203: R21.2@63,41.45 XP2.9@63,43
ATDO: R22.2 XP2.3 | length 1.5
  Bottom Layer w0.203: R22.2@57,41.45 XP2.3@57,43
ATMS: R25.2 R31.2 XP2.5 | length 3.9
  Top Layer w0.203: R31.2@58.35,40.9 59,41.55 XP2.5@59,43
  Bottom Layer w0.203: R25.2@59,41.45 XP2.5@59,43
CLK0_n: C26.2 U1.2 | length 1.8
  Bottom Layer w0.203: C26.2@8.85,28.1 9.237,27.713 9.913,27.713 9.95,27.75 U1.2@10.5,27.75
CLK0_p: C25.2 U1.1 | length 1.8
  Bottom Layer w0.203: C25.2@8.85,26.9 9.24,27.29 9.9,27.29 ; 9.89,27.29 9.93,27.25 U1.1@10.5,27.25
CLK0n: C26.1 R13.2 R14.2 U4.3 | length 22.5
  Top Layer w0.203: U4.3@13.125,39.85 13.125,40.825 v1(13.3,41)
  Bottom Layer w0.203: C26.1@7.35,28.1 6.963,27.713 6.487,27.713 6.3,27.9 5.7,27.9 5.513,27.713 5.087,27.713 4.8,28 4.8,29.1 7.5,31.8 7.5,35.2 9.9,37.6 12.2,37.6 13,38.4 13,40.55 R14.2@13.7,41.25
CLK0p: C25.1 R12.2 R13.1 U4.2 | length 23.2
  Top Layer w0.203: v1(12.3,41) 12.475,40.825 U4.2@12.475,39.85
  Bottom Layer w0.203: C25.1@7.35,26.9 6.96,27.29 6.49,27.29 6.3,27.1 6,27.1 5.7,27.1 5.51,27.29 5.497,27.277 4.906,27.277 4.364,27.819 4.364,29.281 7.064,31.981 7.064,35.381 9.719,38.036 12.019,38.036 12.564,38.581 12.564,40.586 R12.2@11.9,41.25
CLKA: RN1.4 U1.24 | length 6.6
  Bottom Layer w0.254: U1.24@14.75,35.5 14.75,36.75 17.4,39.4 RN1.4@19,39.4
COL: U7.24 U10.28 | length 11.8
  Top Layer w0.203: v1(51.6,24) 52,24.4 52,27 54.25,29.25 U10.28@57.75,29.25
  Bottom Layer w0.203: U7.24@49.925,23.25 50.85,23.25 v1(51.6,24)
CONFD: R26.2 U7.138 | length 4.9
  Top Layer w0.203: R26.2@42.15,34.1 v1(43.3,34.1)
  Bottom Layer w0.203: v1(43.3,34.1) 44.3,34.1 45,34.8 45,35.495 45.099,35.593 45.099,36.474 U7.138@45.15,36.525
CONFS: R19.2 U7.126 | length 2.5
  Top Layer w0.254: R19.2@38.2,35.65 38.45,35.65 v1(39,35.1)
  Bottom Layer w0.254: v1(39,35.1) 39.15,35.25 U7.126@39.15,36.525
CRS: U7.25 U10.29 | length 12.1
  Top Layer w0.203: v1(51.6,23) 52.423,23.823 52.423,26.825 54.348,28.75 U10.29@57.75,28.75
  Bottom Layer w0.203: U7.25@49.925,22.75 51.35,22.75 v1(51.6,23)
CSB: R11.2 RN5.2 U1.46 | length 10.1
  Top Layer w0.203: v1(22.9,26.1) 23.3,25.7 R11.2@26.65,25.7
  Bottom Layer w0.203: U1.46@19.5,28.25 20.024,28.25 21.574,26.7 22.3,26.7 v1(22.9,26.1) RN5.2@24.8,26.1
ENET_GND: C65.2 FB2.1 | length 2
  Top Layer w0.508: FB2.1@65.7,18.25 66.6,17.35 C65.2@66.6,16.586
FADCA0: RN1.6 U7.119 | length 19.1
  Bottom Layer w0.203: RN1.6@20.6,38.6 25.902,38.6 28.641,41.339 31.658,41.339 33.774,39.223 34.575,39.223 35.65,38.148 U7.119@35.65,36.525
FADCA1: RN1.7 U7.118 | length 18.6
  Bottom Layer w0.203: RN1.7@20.6,37.8 20.6,37.923 25.823,37.923 28.816,40.916 31.482,40.916 33.598,38.8 34.4,38.8 35.15,38.05 U7.118@35.15,36.525
FADCA2: RN1.8 U7.114 | length 16.9
  Bottom Layer w0.203: RN1.8@20.6,37 21.1,37 21.6,37.5 26.006,37.5 28.999,40.493 31.306,40.493 33.15,38.648 U7.114@33.15,36.525
FADCA3: RN2.5 U7.113 | length 13.1
  Bottom Layer w0.203: RN2.5@23.6,36.7 25.805,36.7 29.174,40.07 31.13,40.07 32.65,38.55 U7.113@32.65,36.525
FADCA4: RN2.6 U7.112 | length 12.5
  Bottom Layer w0.203: RN2.6@23.6,35.9 25.603,35.9 29.349,39.646 30.952,39.646 32.15,38.448 U7.112@32.15,36.525
FADCA5: RN2.7 U7.111 | length 11.9
  Bottom Layer w0.203: RN2.7@23.6,35.1 25.402,35.1 29.525,39.223 30.775,39.223 31.65,38.348 U7.111@31.65,36.525
FADCA6: RN2.8 U7.110 | length 11.4
  Bottom Layer w0.203: RN2.8@23.6,34.3 23.772,34.472 24.172,34.472 24.3,34.6 25.5,34.6 29.7,38.8 30.6,38.8 31.15,38.25 U7.110@31.15,36.525
FADCA7: RN3.5 U7.106 | length 2.5
  Bottom Layer w0.203: RN3.5@26.4,33.9 27.4,33.9 27.55,33.75 U7.106@28.875,33.75
FADCA8: RN3.6 U7.105 | length 2.5
  Bottom Layer w0.203: RN3.6@26.4,33.1 27.4,33.1 27.55,33.25 U7.105@28.875,33.25
FADCA9: RN3.7 U7.102 | length 2.7
  Bottom Layer w0.203: RN3.7@26.4,32.3 27.3,32.3 27.799,31.801 28.824,31.801 U7.102@28.875,31.75
FADCA10: RN3.8 U7.101 | length 2.6
  Bottom Layer w0.203: RN3.8@26.4,31.5 27.4,31.5 27.65,31.25 U7.101@28.875,31.25
FADCA11: RN4.5 U7.100 | length 5.5
  Bottom Layer w0.203: RN4.5@23.6,31 24.1,31 24.5,30.6 27.4,30.6 27.55,30.75 U7.100@28.875,30.75
FADCA12: RN4.6 U7.99 | length 5.3
  Bottom Layer w0.203: RN4.6@23.6,30.2 23.6,30.177 27.677,30.177 27.75,30.25 U7.99@28.875,30.25
FADCA13: RN4.7 U7.98 | length 5.4
  Bottom Layer w0.203: RN4.7@23.6,29.4 24.246,29.4 24.6,29.754 28.871,29.754 U7.98@28.875,29.75
FCLKA: RN1.5 U7.88 | length 22.3
  Top Layer w0.254: v1(21.8,39.4) 21.8,26 23.2,24.6 v1(27.4,24.6)
  Bottom Layer w0.254: RN1.5@20.6,39.4 v1(21.8,39.4)
  Bottom Layer w0.305: v1(27.4,24.6) 27.55,24.75 U7.88@28.875,24.75
FCSB: RN5.7 U7.91 | length 2.5
  Bottom Layer w0.203: RN5.7@26.4,26.1 27.4,26.1 27.55,26.25 U7.91@28.875,26.25
FMDC: R27.1 U7.33 | length 2.2
  Bottom Layer w0.203: U7.33@49.925,18.75 51.6,18.75 R27.1@51.95,18.4
FSCLK: RN5.6 U7.92 | length 2.5
  Bottom Layer w0.203: RN5.6@26.4,26.9 27.4,26.9 27.55,26.75 U7.92@28.875,26.75
FSDIO: RN5.5 U7.93 | length 2.7
  Bottom Layer w0.203: RN5.5@26.4,27.7 27.4,27.7 27.85,27.25 U7.93@28.875,27.25
FSPARE_OUT: R16.2 U7.65 | length 4.2
  Bottom Layer w0.203: R16.2@33.9,11.35 34.15,11.6 U7.65@34.15,15.475
FT25: R28.2 U7.28 | length 2.8
  Bottom Layer w0.203: U7.28@49.925,21.25 51.15,21.25 51.4,21 R28.2@52.67,21
FTX_N: R17.2 U7.44 | length 2.8
  Bottom Layer w0.203: U7.44@44.65,15.475 44.65,13 R17.2@44.85,12.8
FTX_P: R18.2 U7.59 | length 2.7
  Bottom Layer w0.203: R18.2@37.15,12.8 U7.59@37.15,15.475